# Altium PCB UltraZohm_Digital_BreakoutBoard.PcbDoc
Units mil, origin at the board's own origin, x right, y up, seen from the top; angles counter-clockwise.
Board outline 1968.52 x 3149.61 mil, 2 copper layers (Top Layer, Bottom Layer); 11 components, 55 nets, 236 pads, 48 vias.
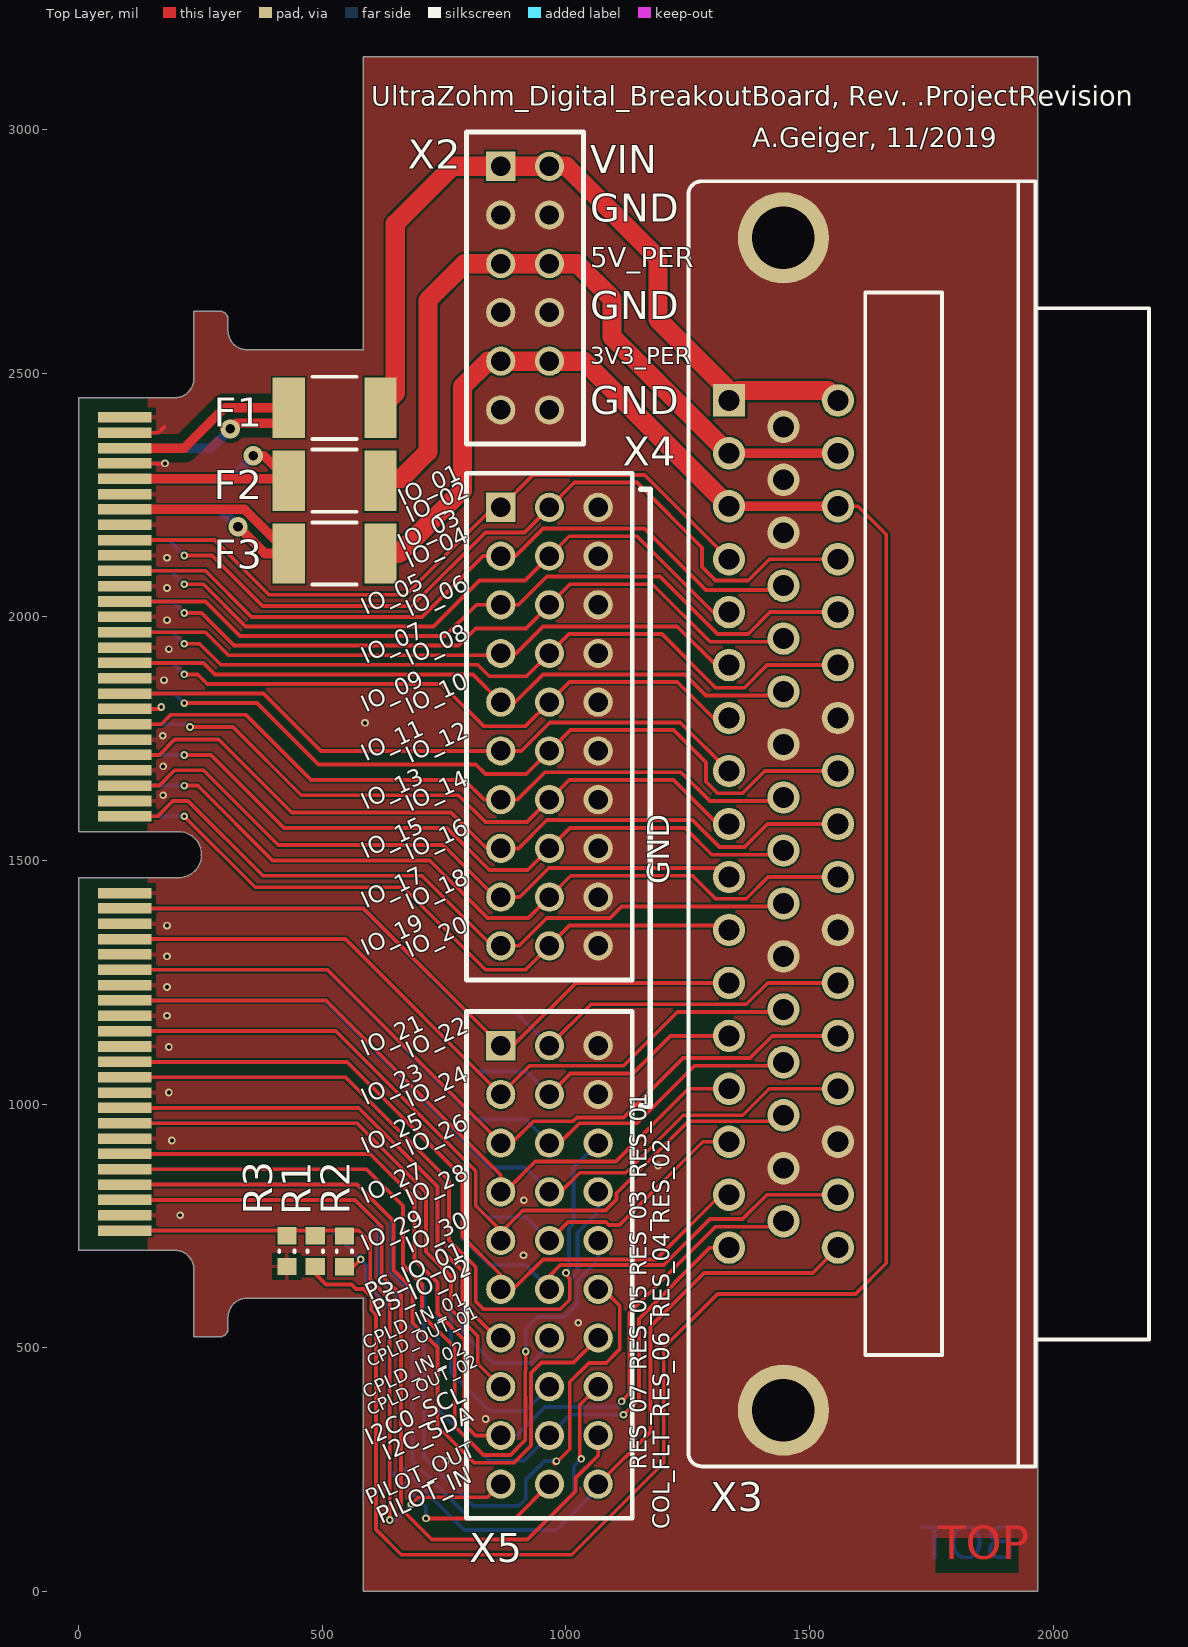
[diagram p0: Top Layer view]
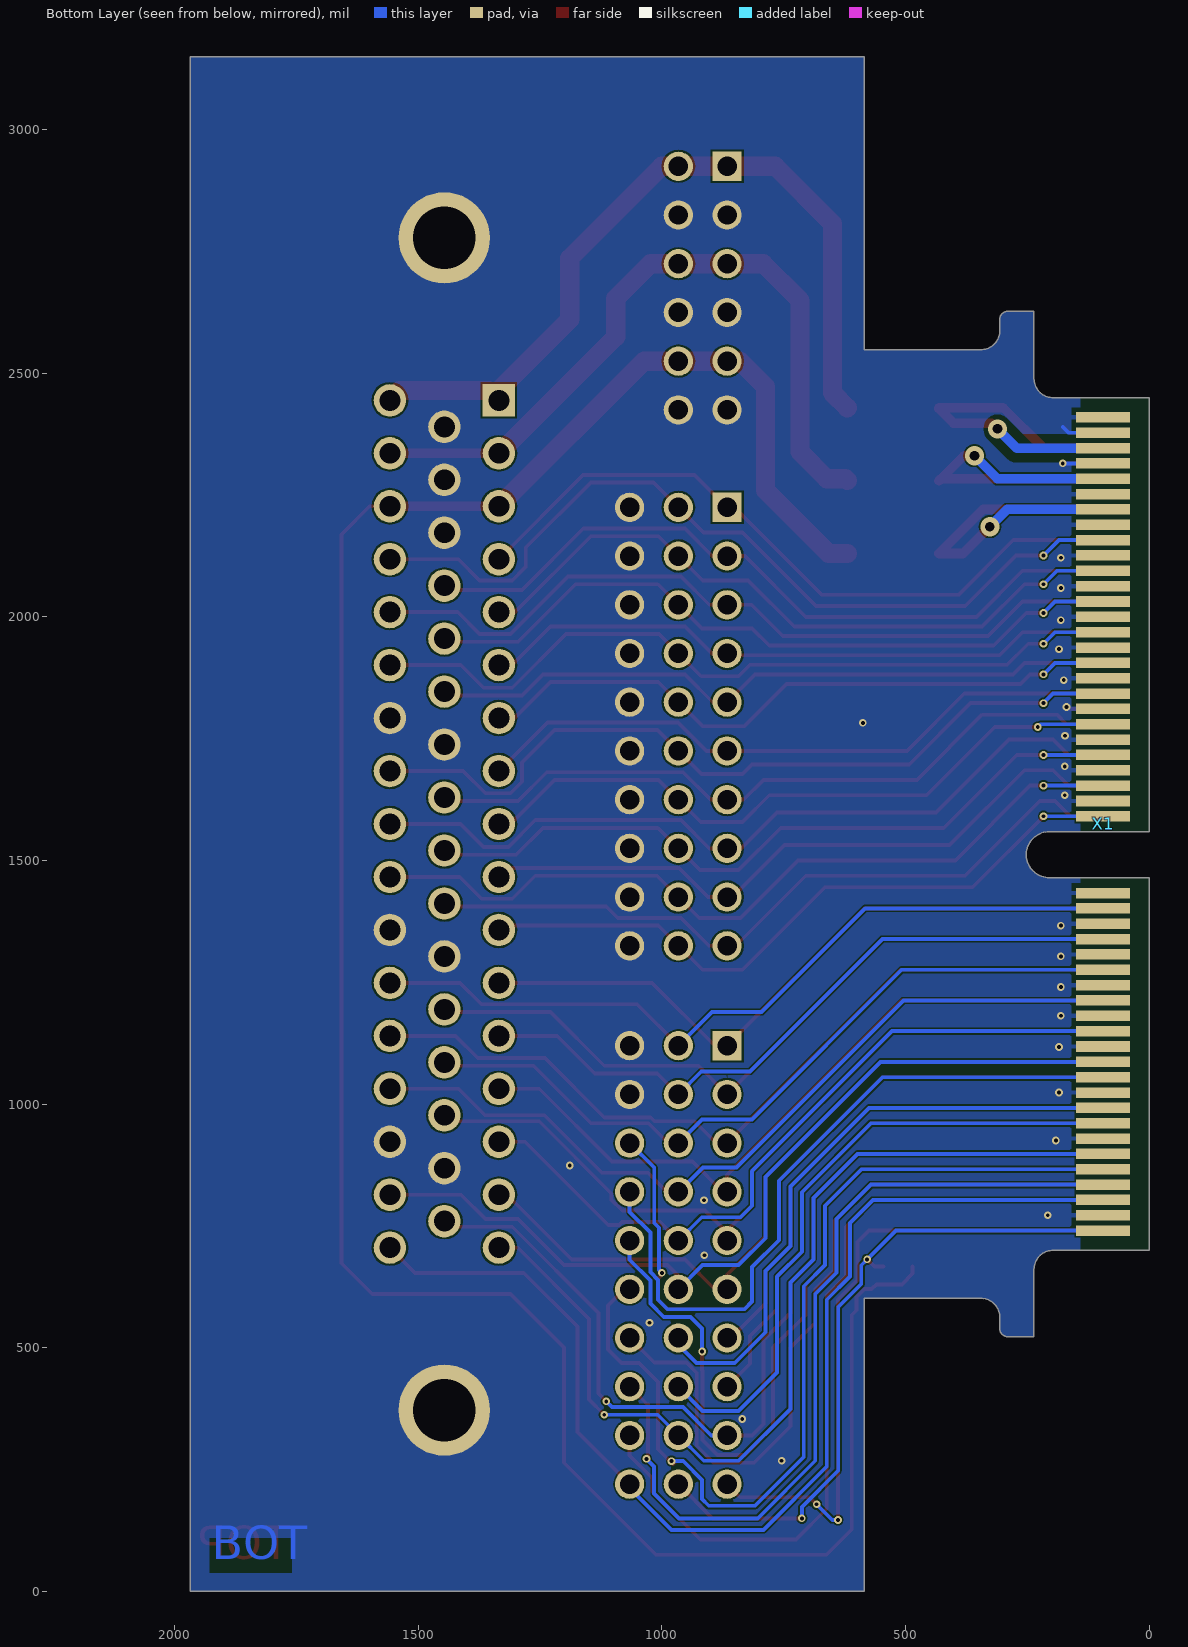
[diagram p1: Bottom Layer view, seen from below]
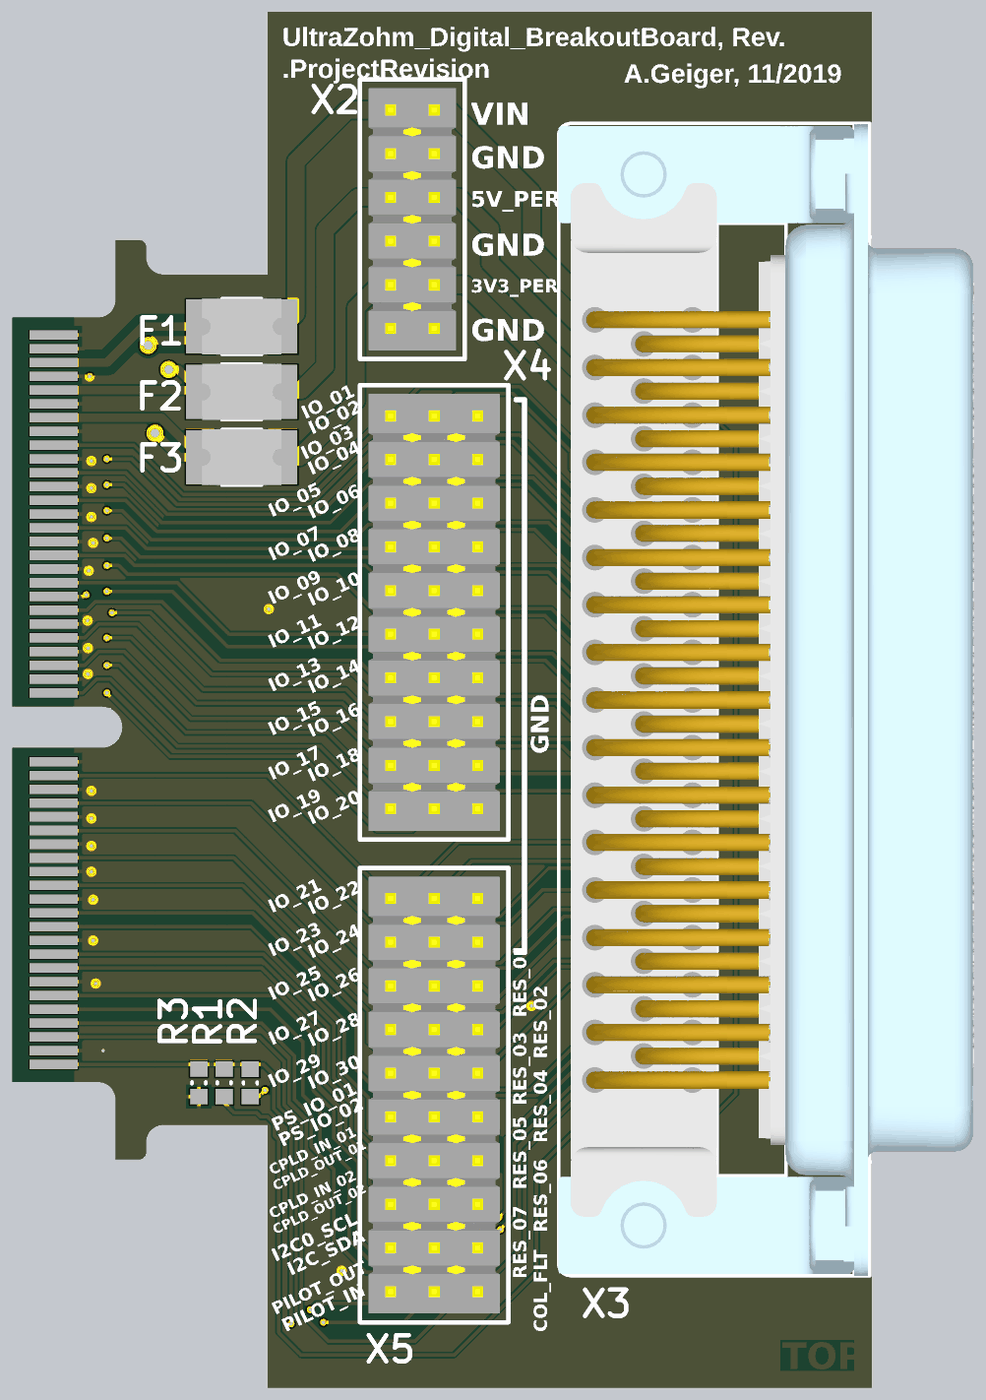
[diagram p2: 3D render of the assembled board from above, using the file's embedded part models]

## Layer stack, top to bottom
Top Solder: solder mask 0.4, Solder Resist, Dk 3.5
Top Layer: signal copper 1.4
Dielectric 1: dielectric 12.6, FR-4, Dk 4.8
Bottom Layer: signal copper 1.4
Bottom Solder: solder mask 0.4, Solder Resist, Dk 3.5

## Board outline
30.7,699.81 196.88,699.81 cw(c196.88,660.44) 236.25,660.44 236.25,522.64 290.57,522.64 ccw(c290.57,538.39) 306.32,538.39 306.32,562.01 cw(c345.69,562.01) 345.69,601.38 584.27,601.38 584.27,0 1968.54,0 1968.54,3149.61 584.27,3149.61 584.27,2548.23 345.69,2548.23 cw(c345.69,2587.6) 306.32,2587.6 306.32,2611.23 ccw(c290.57,2611.23) 290.57,2626.97 236.25,2626.97 236.25,2489.18 cw(c196.88,2489.18) 196.88,2449.81 0.02,2449.81 0.02,1559.06 204.74,1559.06 cw(c204.74,1511.82) 204.74,1464.57 0.02,1464.57 0.02,699.81

## Design rules (kind name [scope] priority, off if disabled: settings)
Clearance Clearance_Power [OnLayer('L05_VCC') or InNet('VIN')] p1: gap=3.94 ignorepadtopadclearanceinfootprint=FALSE except(0: Arc-Hole Track-Hole SMDPad-Hole THPad-Hole Via-Hole Fill-Hole Poly-Hole Region-Hole Text-Hole; 5.91: Via-Poly; 9.84: THPad-Poly; 11.81: Fill-Poly Poly-Poly Poly-Region; 19.68: Track-Poly)
Clearance [All] p2: gap=3.94 ignorepadtopadclearanceinfootprint=FALSE except(0: Arc-Hole Track-Hole SMDPad-Hole THPad-Hole Via-Hole Fill-Hole Poly-Hole Region-Hole Text-Hole)
ComponentClearance [All] p1: gap=3.94 collisioncheckmode=3 verticalgap=3.94 showdistances=FALSE
DiffPairsRouting [All] p1: maxlimit=4.72 minlimit=4.72 mostfreqgap=4.72 toplayer_minwidth=3.94 toplayer_maxwidth=3.94 toplayer_prefwidth=3.94 bottomlayer_minwidth=3.94 bottomlayer_maxwidth=3.94 bottomlayer_prefwidth=3.94 maxuncoupledlength=500
Height [All] p1: minheight=0 maxheight=1968.5 prefheight=500
HoleSize [All] p1: absolutevalues=TRUE maxlimit=157.48 minlimit=1 maxpercent=80.000 minpercent=20.000
PolygonConnect PolygonConnect_Therm [HoleSize > 2.6] p1: connectstyle=Direct reliefconductorwidth=10 reliefentries=4 polygonreliefangle="90 Angle" airgapwidth=10
PolygonConnect PolygonConnect_via [InPadClass('pad') or IsVia] p2: connectstyle=Direct reliefconductorwidth=10 reliefentries=4 polygonreliefangle="90 Angle" airgapwidth=10
PolygonConnect [All] p3: connectstyle=Relief reliefconductorwidth=7.87 reliefentries=4 polygonreliefangle="90 Angle" airgapwidth=9.84
RoutingVias [All] p1: holewidth=7.87 width=15.75 viastyle="Through Hole" minholewidth=7.87 minwidth=15.75 maxholewidth=19.68 maxwidth=39.37
SolderMaskExpansion [All] p1: expansion=4
Width [All] p1: maxlimit=393.7 minlimit=3.94 preferedwidth=3.94
26 further rules are at their usual default settings.

## Components (designator, comment, footprint, x,y, rotation, side; value= is the part's Value field where it differs from the comment)
F1 "PTC, 1.1A, 24V" 1812_PTC_Polyfuse_Littelfuse 525.35,2429.15 r0 top
F2 "PTC, 1.1A, 24V" 1812_PTC_Polyfuse_Littelfuse 525.35,2279.55 r0 top
F3 "PTC, 1.1A, 24V" 1812_PTC_Polyfuse_Littelfuse 525.35,2129.94 r0 top
R1 "dnp" R_0603_N 485.28,697.91 r90 top
R2 "0R" R_0603_N 545.28,697.76 r270 top
R3 "dnp" R_0603_N 427.17,697.91 r90 top
X1 "HSEC8-150-01-XX-DV-A-BL-CARD" HSEC8-150-01-XX-DV-A-BL-CARD 0.02,1574.81 r270 bottom
X2 "TSW-106-07-F-D" TSW-106-XX-XXX-D 916.18,2674.8 r270 top
X3 "D-SUB 50p. female" 164A18759X 1334.67,705.19 r90 top
X4 "TSW-110-07-F-T" TSW-110-XX-XXX-T 966.18,1774.8 r270 top
X5 "TSW-110-07-F-T" TSW-110-XX-XXX-T 966.18,669.8 r270 top

## Footprints (in the part's own frame and the unit in brackets; to place one, negate y for a bottom-side part, rotate by r counter-clockwise, add the part's x,y. Pads: shape width x height; smd on the part's side, far side on the other; paste and mask are expansions set on the pad)
164A18759X [mm]
  rect 1.69x1.69 hole 1.09: 1(44.176,0)
  round 1.69 hole 1.09: 2(41.415,0) 3(38.654,0) 4(35.893,0) 5(33.132,0) 6(30.371,0) 7(27.61,0) 8(24.849,0) 9(22.088,0) 10(19.327,0) 11(16.566,0) 12(13.805,0) 13(11.044,0) 14(8.283,0) 15(5.522,0) 16(2.761,0) 17(0,0) 18(42.795,-2.84) 19(40.034,-2.84) 20(37.273,-2.84) 21(34.512,-2.84) 22(31.751,-2.84) 23(28.99,-2.84) 24(26.23,-2.84) 25(23.469,-2.84) 26(20.707,-2.84) 27(17.946,-2.84) 28(15.185,-2.84) 29(12.424,-2.84) 30(9.664,-2.84) 31(6.903,-2.84) 32(4.142,-2.84) 33(1.381,-2.84) 34(44.176,-5.68) 35(41.415,-5.68) 36(38.654,-5.68) 37(35.893,-5.68) 38(33.132,-5.68) 39(30.371,-5.68) 40(27.61,-5.68) 41(24.849,-5.68) 42(22.088,-5.68) 43(19.327,-5.68) 44(16.566,-5.68) 45(13.805,-5.68) 46(11.044,-5.68) 47(8.283,-5.68) 48(5.522,-5.68) 49(2.761,-5.68) 50(0,-5.68)
  round 4.76 hole 3.26: 51(-8.467,-2.84) 52(52.643,-2.84)
  silkscreen extent -11.4,-21.9 55.6,2.12, body extent -11.42,-22.05 55.58,2.13, height 16.35
1812_PTC_Polyfuse_Littelfuse [mm] "Chip Fuse, 2-Leads, Body 4.6x3.24mm"
  rect 1.68x3.14 smd: 1(-2.39,0) 2(2.39,0)
  silkscreen extent -1.15,-1.62 1.15,1.62, body extent -2.3,-1.62 2.3,1.62, height 1.15
HSEC8-150-01-XX-DV-A-BL-CARD [mm]
  rect 0.55x2.8 smd far side mask+0.05: 1(-21.2,-2.4) 3(-20.4,-2.4) 5(-19.6,-2.4) 7(-18.8,-2.4) 9(-18,-2.4) 11(-17.2,-2.4) 13(-16.4,-2.4) 15(-15.6,-2.4) 17(-14.8,-2.4) 19(-14,-2.4) 21(-13.2,-2.4) 23(-12.4,-2.4) 25(-11.6,-2.4) 27(-10.8,-2.4) 29(-10,-2.4) 31(-9.2,-2.4) 33(-8.4,-2.4) 35(-7.6,-2.4) 37(-6.8,-2.4) 39(-6,-2.4) 41(-5.2,-2.4) 43(-4.4,-2.4) 45(-3.6,-2.4) 47(-2.8,-2.4) 49(-2,-2.4) 51(-1.2,-2.4) 53(-0.4,-2.4) 55(3.6,-2.4) 57(4.4,-2.4) 59(5.2,-2.4) 61(6,-2.4) 63(6.8,-2.4) 65(7.6,-2.4) 67(8.4,-2.4) 69(9.2,-2.4) 71(10,-2.4) 73(10.8,-2.4) 75(11.6,-2.4) 77(12.4,-2.4) 79(13.2,-2.4) 81(14,-2.4) 83(14.8,-2.4) 85(15.6,-2.4) 87(16.4,-2.4) 89(17.2,-2.4) 91(18,-2.4) 93(18.8,-2.4) 95(19.6,-2.4) 97(20.4,-2.4) 99(21.2,-2.4)
  rect 0.55x2.8 smd mask+0.05: 2(-21.2,-2.4) 4(-20.4,-2.4) 6(-19.6,-2.4) 8(-18.8,-2.4) 10(-18,-2.4) 12(-17.2,-2.4) 14(-16.4,-2.4) 16(-15.6,-2.4) 18(-14.8,-2.4) 20(-14,-2.4) 22(-13.2,-2.4) 24(-12.4,-2.4) 26(-11.6,-2.4) 28(-10.8,-2.4) 30(-10,-2.4) 32(-9.2,-2.4) 34(-8.4,-2.4) 36(-7.6,-2.4) 38(-6.8,-2.4) 40(-6,-2.4) 42(-5.2,-2.4) 44(-4.4,-2.4) 46(-3.6,-2.4) 48(-2.8,-2.4) 50(-2,-2.4) 52(-1.2,-2.4) 54(-0.4,-2.4) 56(3.6,-2.4) 58(4.4,-2.4) 60(5.2,-2.4) 62(6,-2.4) 64(6.8,-2.4) 66(7.6,-2.4) 68(8.4,-2.4) 70(9.2,-2.4) 72(10,-2.4) 74(10.8,-2.4) 76(11.6,-2.4) 78(12.4,-2.4) 80(13.2,-2.4) 82(14,-2.4) 84(14.8,-2.4) 86(15.6,-2.4) 88(16.4,-2.4) 90(17.2,-2.4) 92(18,-2.4) 94(18.8,-2.4) 96(19.6,-2.4) 98(20.4,-2.4) 100(21.2,-2.4)
R_0603_N [mm] "SMD Resistor, Body 1.6x0.8mm, IPC Medium Density"
  rect 0.9x1 smd: 1(-0.8,0) 2(0.8,0)
  silkscreen extent -0.05,-0.4 0.05,0.4, body extent -0.85,-0.47 0.85,0.47, height 0.6
TSW-106-XX-XXX-D [mil] "Pinheader, 2.54mm Pitch"
  rect 60x60 hole 40 mask+3: 1(-250,-50)
  round 60 hole 40 mask+3: 2(-250,50) 3(-150,-50) 4(-150,50) 5(-50,-50) 6(-50,50) 7(50,-50) 8(50,50) 9(150,-50) 10(150,50) 11(250,-50) 12(250,50)
  silkscreen extent -320,-120 320,120, body extent -300,-100 300,100, height 330
TSW-110-XX-XXX-T [mil] "Pinheader, 2.54mm Pitch"
  rect 60x60 hole 40 mask+3: 1(-450,-100)
  round 60 hole 40 mask+3: 2(-450,0) 3(-450,100) 4(-350,-100) 5(-350,0) 6(-350,100) 7(-250,-100) 8(-250,0) 9(-250,100) 10(-150,-100) 11(-150,0) 12(-150,100) 13(-50,-100) 14(-50,0) 15(-50,100) 16(50,-100) 17(50,0) 18(50,100) 19(150,-100) 20(150,0) 21(150,100) 22(250,-100) 23(250,0) 24(250,100) 25(350,-100) 26(350,0) 27(350,100) 28(450,-100) 29(450,0) 30(450,100)
  silkscreen extent -520,-170 520,170, body extent -500,-150 500,150, height 330

## Part data
F1 F2 F3: library part Littelfuse_PTC_1812, "Resettable PTC Polyfuse SMD, 1812, automotive"
R1 R2 R3: library part R_0603, "SMD Resistor 0603"
X1: "Mating Card Layout for HSEC8-150-01-XX-DV-A-BL"
X2: library part TSW-106-XX-XXX-D, "Pin Header, 2.54mm"
X3: library part 164A18759X, "D-SUB, female, right angle, 50pos, 9.4mm pitch"
X4 X5: library part TSW-110-XX-XXX-T, "Pin Header, 2.54mm"

## Via types
v1: diameter 15.75, hole 7.87, Top Layer to Bottom Layer, 44 vias
v2: diameter 39.37, hole 19.68, Top Layer to Bottom Layer, 3 vias
v3: diameter 15.75, hole 7.87, Top Layer to Bottom Layer, tented both sides, 1 vias

## Nets (pads, with @x,y where several pads share a name; then routed paths per layer and width w, separated by ;. In a path a pad name is that pad's centre, name@x,y a point inside that pad or via, vN(x,y) a via of type N, cw(c..) or ccw(c..) an arc to the next point about the centre after c; other vN are vias at no path point)
3V3_PER: F3.1 X1.13 X1.14 | length 748.5
  Top Layer w19.68: X1.13 340.72,2220.48 F3.1 381.91,2129.94 v2(326.81,2185.04)
  Bottom Layer w19.68: X1.14 291.37,2220.48 v2(326.81,2185.04)
3V3_PER_FUSED: F3.2 R1.1 X2.9 X2.10 X3.3 X3.36 | length 5055.3
  Top Layer w7.87: R1.1 485.28,652.06 507.42,629.92 559.51,629.92 569.39,620.04 584.25,620.04 600.39,603.89 600.39,576.81 610.28,566.92 610.28,126.46 661.93,74.8 1011.85,74.8 1200.83,263.78 1200.83,500 1311.06,610.24 1594.53,610.24 1657.52,673.23 1657.52,2169.29 1599.81,2227 X3.36
  Top Layer w19.68: X3.3 X3.36
  Top Layer w39.37: F3.2 657.54,2129.94 787.44,2259.84 787.44,2472.44 839.8,2524.8 X2.9 X2.10 1036.87,2524.8 X3.3
5V_PER: F2.1 X1.9 X1.10 | length 710.3
  Top Layer w19.68: X1.9 F2.1@427.34,2283.47 ; v2(358.31,2330.71) 380.1,2330.71 F2.1@427.34,2283.47 ; F2.1 F2.1@427.34,2283.47
  Bottom Layer w19.68: X1.10 311.07,2283.47 v2(358.31,2330.71)
5V_PER_FUSED: F2.2 X2.5 X2.6 X3.2 X3.35 | length 1512.8
  Top Layer w19.68: X3.2 X3.35
  Top Layer w39.37: F2.2 623.37,2283.46 661.46,2283.46 716.57,2338.58 716.57,2649.61 791.77,2724.8 X2.5 X2.6 1023.27,2724.8 1094.53,2653.54 1094.53,2574.8 1333.63,2335.71 X3.2
COLLECTIVE_FLT: X1.96 X3.50 X5.30 | length 2380.9
  Top Layer w7.87: X5.30 1173.27,326.89 1173.27,543.31 1283.5,653.54 1506.64,653.54 X3.50
  Bottom Layer w7.87: X1.96 515.78,803.15 566.96,803.15 614.06,756.06 614.06,645.82 661.46,598.43 661.46,255.91 791.38,125.98 980.35,125.98 1066.18,211.81 X5.30
CPLD_DIGIN_01: X1.83 X5.19 | length 1078
  Top Layer w7.87: X1.83 574.84,992.13 736.26,830.71 736.26,708.66 787.44,657.48 787.44,590.55 858.19,519.8 X5.19
CPLD_DIGIN_02: X1.85 X5.22 | length 1139.5
  Top Layer w7.87: X1.85 295.31,960.64 570.9,960.64 712.64,818.9 712.64,696.85 763.82,645.67 763.82,578.74 818.94,523.62 818.94,467.05 X5.22
CPLD_DIGOUT_01: X1.84 X5.20 | length 1263.5
  Bottom Layer w7.87: X1.84 574.84,992.13 736.26,830.71 736.26,708.66 787.44,657.48 787.44,531.5 850.43,468.5 929.17,468.5 966.18,505.51 X5.20
CPLD_DIGOUT_02: X1.86 X5.23 | length 1323.7
  Bottom Layer w7.87: X1.86 570.9,960.64 712.64,818.9 712.64,696.85 763.82,645.67 763.82,448.82 842.56,370.08 916.46,370.08 X5.23
DIG_IO_01: X1.17 X3.4 X4.1 | length 1460.3
  Top Layer w7.87: X1.17 278.75,2157.49 391.05,2045.19 671.21,2045.19 850.83,2224.8 X4.1 932.72,2291.34 1161.63,2291.34 X3.4
DIG_IO_02: X1.18 X3.37 X4.2 | length 1749.2
  Top Layer w7.87: v1(216.57,2125.98) 273.18,2125.98 377.22,2021.95 683.4,2021.95 834.69,2173.23 914.61,2173.23 X4.2 1016.97,2275.59 1145.71,2275.59 1279.57,2141.73 1279.57,2102.36 1307.13,2074.8 1374.06,2074.8 1417.56,2118.3 X3.37
  Bottom Layer w7.87: X1.18 185.07,2157.49 v1(216.57,2125.98)
DIG_IO_03: X1.21 X3.21 X4.4 | length 1522
  Top Layer w7.87: X1.21 259.88,2094.49 354.37,2000 704.76,2000 829.57,2124.8 X4.4 896.5,2124.8 952.8,2181.1 1161.46,2181.1 1287.44,2055.12 1437.64,2055.12 X3.21
DIG_IO_04: X1.22 X3.5 X4.5 | length 1428.6
  Top Layer w7.87: v1(216.57,2066.93) 255.94,2066.93 342.56,1980.32 728.39,1980.32 822.87,2074.8 916.18,2074.8 X4.5 1006.73,2165.35 1145.71,2165.35 1301.46,2009.6 X3.5
  Bottom Layer w7.87: X1.22 189.01,2094.49 v1(216.57,2066.93)
DIG_IO_05: X1.25 X3.38 X4.7 | length 1611.3
  Top Layer w7.87: X1.25 259.88,2031.5 330.75,1960.63 752.01,1960.63 816.18,2024.8 X4.7 902.8,2024.8 960.67,2082.68 1192.95,2082.68 1311.06,1964.57 1374.06,1964.57 1419.09,2009.6 X3.38
DIG_IO_06: X1.26 X3.22 X4.8 | length 1493.3
  Top Layer w7.87: v1(216.57,2007.87) 252.01,2007.87 318.94,1940.94 779.57,1940.94 815,1976.38 917.76,1976.38 X4.8 1008.31,2066.93 1177.2,2066.93 1295.32,1948.82 1440.04,1948.82 X3.22
  Bottom Layer w7.87: X1.26 192.95,2031.5 v1(216.57,2007.87)
DIG_IO_07: X1.29 X3.6 X4.10 | length 1317.1
  Top Layer w7.87: X1.29 259.88,1968.51 307.13,1921.26 862.64,1921.26 X4.10 897.28,1924.8 952.8,1980.32 1228.39,1980.32 1307.8,1900.9 X3.6
DIG_IO_08: X1.30 X3.39 X4.11 | length 1602.1
  Top Layer w7.87: v1(216.57,1944.88) 248.07,1944.88 291.38,1901.57 818.94,1901.57 842.56,1877.95 919.33,1877.95 X4.11 1005.94,1964.57 1196.89,1964.57 1307.13,1854.33 1366.18,1854.33 1412.75,1900.9 X3.39
  Bottom Layer w7.87: X1.30 192.95,1968.51 v1(216.57,1944.88)
DIG_IO_09: X1.33 X3.23 X4.13 | length 1430.3
  Top Layer w7.87: X1.33 255.94,1905.52 279.57,1881.89 809.09,1881.89 X4.13 895.71,1824.8 952.8,1881.89 1244.13,1881.89 1287.44,1838.58 1438.51,1838.58 X3.23
DIG_IO_10: X1.34 X3.7 X4.14 | length 1362.1
  Top Layer w7.87: v1(216.57,1881.89) 244.13,1881.89 263.82,1862.2 744.13,1862.2 830.75,1775.59 916.97,1775.59 X4.14 1007.52,1866.14 1228.39,1866.14 1302.33,1792.2 X3.7
  Bottom Layer w7.87: X1.34 192.95,1905.52 v1(216.57,1881.89)
DIG_IO_11: X1.37 X3.8 X4.16 | length 1354.6
  Top Layer w7.87: X1.37 379.33,1842.52 497.06,1724.8 X4.16 908.14,1724.8 966.8,1783.46 1234.7,1783.46 X3.8
DIG_IO_12: X1.38 X3.41 X4.17 | length 1665.6
  Top Layer w7.87: v1(216.57,1822.83) 366.18,1822.83 492.17,1696.85 815,1696.85 834.68,1677.17 918.54,1677.17 X4.17 1009.09,1767.72 1220.51,1767.72 1287.44,1700.79 1287.44,1661.42 1311.06,1637.8 1362.24,1637.8 1407.95,1683.5 X3.41
  Bottom Layer w7.87: X1.38 196.88,1842.52 v1(216.57,1822.83)
DIG_IO_13: X1.41 X3.25 X4.19 | length 1483.1
  Top Layer w7.87: X1.41 169.34,1779.53 189.02,1799.21 342.56,1799.21 476.42,1665.35 791.38,1665.35 831.93,1624.8 X4.19 900.43,1624.8 956.73,1681.1 1236.26,1681.1 1295.32,1622.05 1439.38,1622.05 X3.25
DIG_IO_14: X1.42 X3.9 X4.20 | length 1396.7
  Top Layer w7.87: v1(228.35,1773.86) 316.73,1773.86 456.73,1633.86 779.57,1633.86 834.68,1578.74 920.12,1578.74 X4.20 1006.73,1665.35 1220.51,1665.35 1311.07,1574.8 X3.9
  Bottom Layer w7.87: X1.42 222.67,1779.53 v1(228.35,1773.86)
DIG_IO_15: X1.45 X3.42 X4.22 | length 1635.7
  Top Layer w7.87: X1.45 165.4,1716.54 196.89,1748.03 287.44,1748.03 437.05,1598.43 763.82,1598.43 837.44,1524.8 X4.22 902.8,1524.8 960.67,1582.68 1259.88,1582.68 1315,1527.56 1366.18,1527.56 1413.42,1574.8 X3.42
DIG_IO_16: X1.46 X3.26 X4.23 | length 1512.1
  Top Layer w7.87: v1(216.57,1716.54) 271.69,1716.54 421.3,1566.93 755.94,1566.93 842.56,1480.32 921.69,1480.32 X4.23 1008.31,1566.93 1244.13,1566.93 1299.25,1511.81 1437.84,1511.81 X3.26
  Bottom Layer w7.87: X1.46 v1(216.57,1716.54)
DIG_IO_17: X1.49 X3.10 X4.25 | length 1393.1
  Top Layer w7.87: X1.49 165.4,1653.55 196.89,1685.04 255.94,1685.04 409.49,1531.5 748.07,1531.5 854.76,1424.8 X4.25 905.16,1424.8 964.61,1484.25 1316.52,1484.25 X3.10
DIG_IO_18: X1.50 X3.43 X4.26 | length 1650.3
  Top Layer w7.87: v1(216.57,1653.54) 244.13,1653.54 397.68,1500 720.51,1500 838.62,1381.89 923.27,1381.89 X4.26 1009.88,1468.5 1259.88,1468.5 1307.13,1421.26 1370.12,1421.26 1414.96,1466.1 X3.43
  Bottom Layer w7.87: X1.50 v1(216.57,1653.54)
DIG_IO_19: X1.53 X3.27 X4.28 | length 1524.2
  Top Layer w7.87: X1.53 161.46,1590.56 192.95,1622.05 224.45,1622.05 377.99,1468.5 704.76,1468.5 848.46,1324.8 X4.28 903.58,1324.8 960.67,1381.89 1090.59,1381.89 1114.21,1405.51 1440.24,1405.51 X3.27
DIG_IO_20: X1.54 X3.11 X4.29 | length 1411.8
  Top Layer w7.87: v1(216.57,1590.55) 362.24,1444.88 665.39,1444.88 834.68,1275.59 916.97,1275.59 X4.29 1007.52,1366.14 1325.92,1366.14 X3.11
  Bottom Layer w7.87: X1.54 v1(216.57,1590.55)
DIG_IO_21: X1.57 X3.12 X5.1 | length 1410.3
  Top Layer w7.87: X1.57 295.31,1401.58 584.4,1401.58 X5.1 891.5,1119.8 1020.39,1248.7 X3.12
DIG_IO_22: X1.58 X3.45 X5.2 | length 1633.9
  Top Layer w7.87: X5.2 1051.1,1204.72 1370.12,1204.72 1414.09,1248.7 X3.45
  Bottom Layer w7.87: X1.58 582.71,1401.58 795.32,1188.98 897.01,1188.98 X5.2
DIG_IO_23: X1.61 X3.29 X5.4 | length 1556.3
  Top Layer w7.87: X1.61 295.31,1338.59 547.4,1338.59 X5.4 925.12,1078.74 1118.15,1078.74 1228.39,1188.98 1441.11,1188.98 X3.29
DIG_IO_24: X1.62 X3.13 X5.5 | length 1422
  Top Layer w7.87: X5.5 1009.37,1062.99 1137.83,1062.99 1214.84,1140 X3.13
  Bottom Layer w7.87: X1.62 547.28,1338.59 818.94,1066.93 919.06,1066.93 X5.5
DIG_IO_25: X1.65 X3.46 X5.7 | length 1702.4
  Top Layer w7.87: X1.65 295.31,1275.6 510.39,1275.6 X5.7 888.35,919.8 933.11,964.57 1014.83,964.57 1022.71,972.44 1118.15,972.44 1240.2,1094.49 1377.99,1094.49 1423.5,1140 X3.46
DIG_IO_26: X1.66 X3.30 X5.8 | length 1568
  Top Layer w7.87: X5.8 986.77,919.8 1027.6,960.63 1145.71,960.63 1263.82,1078.74 1439.57,1078.74 X3.30
  Bottom Layer w7.87: X1.66 507.91,1275.6 815,968.5 917.48,968.5 X5.8
DIG_IO_27: X1.69 X3.14 X5.10 | length 1510.7
  Top Layer w7.87: X1.69 295.31,1212.6 507.91,1212.6 866.18,854.33 X5.10 874.96,819.8 937.05,881.89 1102.4,881.89 1251.81,1031.3 X3.14
DIG_IO_28: X1.70 X3.47 X5.11 | length 1714.1
  Top Layer w7.87: X5.11 989.13,819.8 1028.21,858.88 1122.7,858.88 1240.76,976.95 1362.81,976.95 1417.16,1031.3 X3.47
  Bottom Layer w7.87: X1.70 503.97,1212.6 846.5,870.08 915.91,870.08 X5.11
DIG_IO_29: X1.73 X3.31 X5.13 | length 1690.6
  Top Layer w7.87: X1.73 291.37,1149.61 527.59,1149.61 815,862.2 815,791.34 866.18,740.16 X5.13@866.18,736.22 ; X5.13 X5.13@866.18,736.22 ; X3.31 1434.1,964.57 1251.81,964.57 1104.06,816.81 1104.06,804.12 1081.34,781.4 911.36,781.4 X5.13@866.18,736.22
DIG_IO_30: X1.74 X3.15 X5.14 | length 1548.6
  Top Layer w7.87: X5.14 1004.06,757.68 1081.87,757.68 1087.73,751.81 1110.12,751.81 1280.9,922.6 X3.15
  Bottom Layer w7.87: X1.74 527.59,1149.61 815,862.2 815,791.34 838.62,767.72 918.27,767.72 X5.14
DIG_RES_01: X1.79 X5.9 | length 1583.9
  Top Layer w7.87: X1.79 295.31,1055.12 547.28,1055.12 759.88,842.52 759.88,720.47 815,665.35 815,594.49 830.75,578.74 988.23,578.74 1007.91,598.43 1007.91,641.73 1000.04,649.61 v1(1000.04,653.54)
  Bottom Layer w7.87: v1(1000.04,653.54) 1005.94,659.45 1005.94,746.06 1015.79,755.91 1015.79,869.41 X5.9
DIG_RES_02: X1.80 X5.12 | length 1477.4
  Bottom Layer w7.87: X1.80 547.28,1055.12 759.88,842.52 759.88,720.47 815,665.35 815,594.49 830.75,578.74 988.23,578.74 1007.91,598.43 1007.91,639.15 1023.66,654.89 1023.66,736.22 1066.18,778.74 X5.12
DIG_RES_03: X1.91 X5.15 | length 1784.7
  Top Layer w7.87: X1.91 590.59,866.15 665.39,791.34 665.39,669.29 704.76,629.92 704.76,566.93 771.69,500 771.69,338.58 830.75,279.53 885.87,279.53 916.5,310.16 916.5,340.38 916.63,340.52 916.63,399.09 916.5,399.22 916.5,452.84 917.36,453.71 v1(917.36,492.13)
  Bottom Layer w7.87: v1(917.36,492.13) 917.36,539.37 940.98,562.99 996.1,562.99 1023.66,590.55 1023.66,637.8 1066.18,680.31 X5.15
DIG_RES_04: X1.92 X5.18 | length 2000.4
  Top Layer w7.87: v1(980.35,267.05) 977.12,267.05 973.85,263.78 977.1,260.53 1007.91,291.34 1007.91,429.13 1047.28,468.5 1082.72,468.5 1110.28,496.06 1110.28,586.61 1077.09,619.8 X5.18 X5.18@1066.18,601.57
  Bottom Layer w7.87: X1.92 535.47,866.15 590.59,866.15 665.39,791.34 665.39,669.29 708.7,625.98 708.7,275.59 808.87,175.43 903.81,175.43 917.52,189.13 917.52,228.11 917.32,228.31 956.06,267.05 v1(980.35,267.05)
DIG_RES_05: X1.93 X5.21 | length 1595.8
  Top Layer w7.87: X1.93 295.31,834.65 570.9,834.65 645.71,759.84 645.71,659.41 685.08,620.04 685.08,551.18 736.26,500 736.26,338.58 811.06,263.78 893.74,263.78 928.44,298.48 928.44,303.98 928.31,304.12 928.31,335.49 928.44,335.63 928.44,403.98 928.31,404.12 928.31,447.95 949.76,469.41 1015.79,469.41 X5.21
DIG_RES_06: X1.94 X5.24 | length 1735.6
  Top Layer w7.87: v1(1031.5,271.65) 1028.31,274.84 1028.31,383.58 1029.13,382.76 X5.24
  Bottom Layer w7.87: X1.94 531.53,834.65 570.9,834.65 641.73,763.82 641.73,653.58 685.08,610.24 685.08,267.72 803.19,149.61 964.61,149.61 1015.94,200.94 1015.94,256.1 v1(1031.5,271.65)
DIG_RES_07: X1.95 X5.27 | length 1704.9
  Top Layer w7.87: X1.95 566.96,803.15 622.09,748.03 622.09,647.55 661.46,608.18 661.46,169.29 724.45,106.3 921.3,106.3 1019.68,204.68 1019.68,232.24 1066.18,278.74 X5.27
GND: R3.1 X1.1 X1.2 X1.3 X1.4 X1.7 X1.8 X1.11 X1.12 X1.15 X1.16 X1.19 X1.20 X1.23 X1.24 X1.27 X1.28 X1.31 X1.32 X1.35 X1.36 X1.39 X1.40 X1.43 X1.44 X1.47 X1.48 X1.51 X1.52 X1.55 X1.56 X1.59 X1.60 X1.63 X1.64 X1.67 X1.68 X1.71 X1.72 X1.75 X1.76 X1.81 X1.82 X1.87 X1.88 X1.97 X1.98 X2.3 X2.4 X2.7 X2.8 X2.11 X2.12 X3.18 X3.19 X3.20 X3.24 X3.28 X3.32 X3.40 X3.44 X3.48 X3.51 X3.52 X4.3 X4.6 X4.9 X4.12 X4.15 X4.18 X4.21 X4.24 X4.27 X4.30 X5.3 X5.6 | length 414.7
  Top Layer w7.87: X1.39 165.4,1811.03 v1(169.34,1814.96) ; X1.7 157.75,2314.97 v1(177.17,2314.96) ; X1.3 163.21,2377.96 175.01,2389.76
  Bottom Layer w7.87: X1.8 v1(177.17,2314.96) ; X1.4 165.36,2377.96 177.17,2389.76
  other v1: 754.2,267.72 835.19,353.69 1025.36,551.18 912.75,689.62 913.64,802.69 1188.98,873.86 191.21,925.2 185.04,1023.63 185.04,1117.07 181.1,1181.11 181.1,1240.16 181.1,1303.16 181.1,1366.15 173.24,1633.86 173.23,1693.07 172.41,1755.91 587.48,1782.37 175.01,1870.08 185.04,1933.76 181.1,1993.34 181.1,2059.06 181.1,2121.38
  other v3: 208.05,771.65
I2C0_SCL: X1.89 X3.33 X5.25 | length 2082.2
  Top Layer w7.87: X1.89 598.46,897.64 689.02,807.09 689.02,681.1 736.26,633.86 736.26,570.87 791.38,515.75 791.38,343.09 814.67,319.8 X5.25 ; v1(1114.21,389.76) 1129.96,405.51 1129.96,570.87 1307.13,748.03 1434.97,748.03 X3.33
  Bottom Layer w7.87: X5.25 898.58,319.8 956.73,377.95 1102.4,377.95 v1(1114.21,389.76)
I2C0_SDA: X1.90 X3.17 X5.26 | length 2005.2
  Top Layer w7.87: v1(1118.15,362.2) 1149.65,393.7 1149.65,559.06 1295.78,705.19 X3.17
  Bottom Layer w7.87: X1.90 598.46,897.64 689.02,807.09 689.02,681.1 736.26,633.86 736.26,374.02 842.56,267.72 914.09,267.72 X5.26 1008.58,362.2 v1(1118.15,362.2)
PILOT_IN: R2.2 X1.100 X5.29 | length 1418
  Top Layer w7.87: R2.2 563.94,666.26 v1(578.78,681.1) ; v1(712.6,149.61) 895.98,149.61 X5.29
  Bottom Layer w7.87: X1.100 519.72,740.16 v1(578.78,681.1) 590.71,669.17 590.71,630.38 637.83,583.25 637.83,248.03 712.6,173.27 v1(712.6,149.61)
PILOT_OUT: R1.2 R2.1 R3.2 X1.99 X5.28 | length 1358.6
  Top Layer w7.87: X1.99 574.84,740.16 598.46,716.54 598.46,638.9 638.47,598.9 v1(638.47,146.35) ; v1(682.43,178.46) 696.89,192.91 839.29,192.91 X5.28
  Bottom Layer w7.87: v1(638.47,146.35) 650.33,146.35 v1(682.43,178.46)
PS_DIG_GPIO_01: X1.77 X3.16 X5.16 | length 1602.9
  Top Layer w7.87: X1.77 551.22,1086.62 787.44,850.39 787.44,728.35 866.18,649.61 X5.16 891.5,619.8 952.8,681.1 1185.08,681.1 1317.87,813.89 X3.16
PS_DIG_GPIO_02: X1.78 X3.49 X5.17 | length 1827.4
  Top Layer w7.87: X5.17 966.18,647.24 988.23,669.29 1200.83,669.29 1295.32,763.78 1362.24,763.78 1412.36,813.89 X3.49
  Bottom Layer w7.87: X1.78 551.22,1086.62 787.44,850.39 787.44,724.41 842.56,669.29 916.69,669.29 X5.17
VIN: F1.1 X1.5 X1.6 | length 743.1
  Top Layer w19.68: X1.5 216.58,2346.46 299.27,2429.15 F1.1 431.26,2427.28 401.61,2397.64 322.87,2397.64 v2(311.06,2385.83)
  Bottom Layer w19.68: X1.6 271.71,2346.46 v2(311.06,2385.83)
VIN_FUSED: F1.2 X2.1 X2.2 X3.1 X3.34 | length 1649.2
  Top Layer w39.37: F1.2 649.65,2459.35 649.65,2807.09 767.36,2924.8 X2.1 X2.2 1000.43,2924.8 1189.02,2736.22 1189.02,2610.24 1334.67,2464.58 X3.1 1354.83,2464.57 1538.13,2464.57 X3.34

## Polygon pours and split planes (outlines as drawn)
GND on Bottom Layer "GND_Bot_Plane" (solid, remove dead copper, pour order 1): 141.73,699.81 196.88,699.81 cw(c196.88,660.44) 236.25,660.44 236.25,522.64 290.57,522.64 ccw(c290.57,538.39) 306.32,538.39 306.32,562.01 cw(c345.69,562.01) 345.69,601.38 584.27,601.38 584.27,0 1968.5,0 1968.5,3149.61 584.27,3149.61 584.27,2548.23 345.69,2548.23 cw(c345.69,2587.6) 306.32,2587.6 306.32,2611.23 ccw(c290.57,2611.23) 290.57,2626.97 236.25,2626.97 236.25,2489.18 cw(c196.88,2489.18) 196.88,2449.81 141.73,2449.81 141.73,1559.06 204.74,1559.06 cw(c204.74,1511.82) 204.74,1464.57 141.73,1464.57
GND on Top Layer "GND_Top_Plane" (solid, remove dead copper, pour order 0): 141.73,699.81 196.88,699.81 cw(c196.88,660.44) 236.25,660.44 236.25,522.64 290.57,522.64 ccw(c290.57,538.39) 306.32,538.39 306.32,562.01 cw(c345.69,562.01) 345.69,601.38 584.27,601.38 584.27,0 1968.5,0 1968.5,3149.61 584.27,3149.61 584.27,2548.23 345.69,2548.23 cw(c345.69,2587.6) 306.32,2587.6 306.32,2611.23 ccw(c290.57,2611.23) 290.57,2626.97 236.25,2626.97 236.25,2489.18 cw(c196.88,2489.18) 196.88,2449.81 141.73,2449.81 141.73,1559.06 204.74,1559.06 cw(c204.74,1511.82) 204.74,1464.57 141.73,1464.57

## Other copper
Top Layer:
  text "TOP" at 1762.8,43.11 h118.11
Bottom Layer:
  text "BOT" at 1924.09,43.11 h118.11

## Silkscreen, mask and mechanical layers (free items; w line width, h text height)
Top Overlay:
  lines w11.81: 1153.58,996.06 1173.27,996.06 1173.27,2261.81 1153.58,2261.81
  text "UltraZohm_Digital_BreakoutBoard, Rev. .ProjectRevision" at 600.52,3035.56 h68.9
  text "A.Geiger, 11/2019" at 1382.52,2951 h68.9
  text "VIN" at 1049.78,2891.43 h98.43
  text "GND" at 1049.87,2791.43 h98.43
  text "5V_PER" at 1049.87,2703.24 h70.87
  text "GND" at 1049.87,2591.43 h98.43
  text "3V3_PER" at 1049.87,2507.18 h59.06
  text "GND" at 1049.87,2396.43 h98.43
  text "IO_01" at 670.55,2217.04 h59.06 r25
  text "IO_02" at 686.3,2181.61 h59.06 r25
  text "IO_03" at 669.35,2124.09 h59.06 r25
  text "IO_04" at 685.09,2088.66 h59.06 r25
  text "IO_05" at 594.54,1992.59 h59.06 r25
  text "IO_06" at 685.09,1988.66 h59.06 r25
  text "IO_07" at 594.54,1892.59 h59.06 r25
  text "IO_08" at 685.09,1888.66 h59.06 r25
  text "IO_09" at 594.54,1792.59 h59.06 r25
  text "IO_10" at 685.09,1788.66 h59.06 r25
  text "IO_11" at 594.54,1692.59 h59.06 r25
  text "IO_12" at 685.09,1688.66 h59.06 r25
  text "IO_13" at 594.54,1592.59 h59.06 r25
  text "IO_14" at 685.09,1588.66 h59.06 r25
  text "IO_15" at 594.54,1492.59 h59.06 r25
  text "IO_16" at 685.09,1488.66 h59.06 r25
  text "GND" at 1227.87,1450.63 h78.74 r90
  text "IO_17" at 594.54,1390.23 h59.06 r25
  text "IO_18" at 685.09,1386.29 h59.06 r25
  text "IO_19" at 594.54,1292.59 h59.06 r25
  text "IO_20" at 685.09,1288.66 h59.06 r25
  text "IO_21" at 594.54,1086.29 h59.06 r25
  text "IO_22" at 685.09,1082.36 h59.06 r25
  text "IO_23" at 594.54,986.29 h59.06 r25
  text "IO_24" at 685.09,982.36 h59.06 r25
  text "IO_25" at 594.54,886.29 h59.06 r25
  text "IO_26" at 685.09,882.36 h59.06 r25
  text "RES_01" at 1177.22,847.71 h59.06 r90
  text "IO_27" at 594.54,783.93 h59.06 r25
  text "IO_28" at 685.09,780 h59.06 r25
  text "RES_02" at 1224.46,753.22 h59.06 r90
  text "IO_29" at 594.54,686.29 h59.06 r25
  text "IO_30" at 685.09,682.36 h59.06 r25
  text "RES_03" at 1177.22,646.92 h59.06 r90
  text "PS_IO_01" at 602.42,586.29 h59.06 r25
  text "RES_04" at 1224.46,560.31 h59.06 r90
  text "PS_IO_02" at 618.16,550.86 h59.06 r25
  text "CPLD_IN_01" at 594.54,486.29 h47.24 r25
  text "RES_05" at 1177.22,454.01 h59.06 r90
  text "CPLD_OUT_01" at 602.42,450.86 h43.31 r25
  text "CPLD_IN_02" at 594.54,386.29 h47.24 r25
  text "RES_06" at 1224.46,355.59 h59.06 r90
  text "CPLD_OUT_02" at 602.42,350.86 h43.31 r25
  text "I2C0_SCL" at 602.42,287.87 h59.06 r25
  text "I2C_SDA" at 637.85,256.37 h59.06 r25
  text "RES_07" at 1177.22,249.29 h59.06 r90
  text "PILOT_OUT" at 602.42,166.61 h55.12 r25
  text "PILOT_IN" at 626.04,127.24 h59.06 r25
  text "COL_FLT" at 1224.46,127.24 h59.06 r90
Mechanical 1:
  lines w7.87: 584.27,601.38 584.27,0 1968.5,0 1968.5,3149.61 584.27,3149.61 584.27,2548.23